# Altium PCB buck&boost.PcbDoc
Units mil, origin at the board's own origin, x right, y up, seen from the top; angles counter-clockwise.
Board outline 1057.5 x 651.26 mil, 2 copper layers (Top Layer, Bottom Layer); 9 components, 6 nets, 36 pads, 2 vias.
Unrouted connection lines stored in the file: 1.
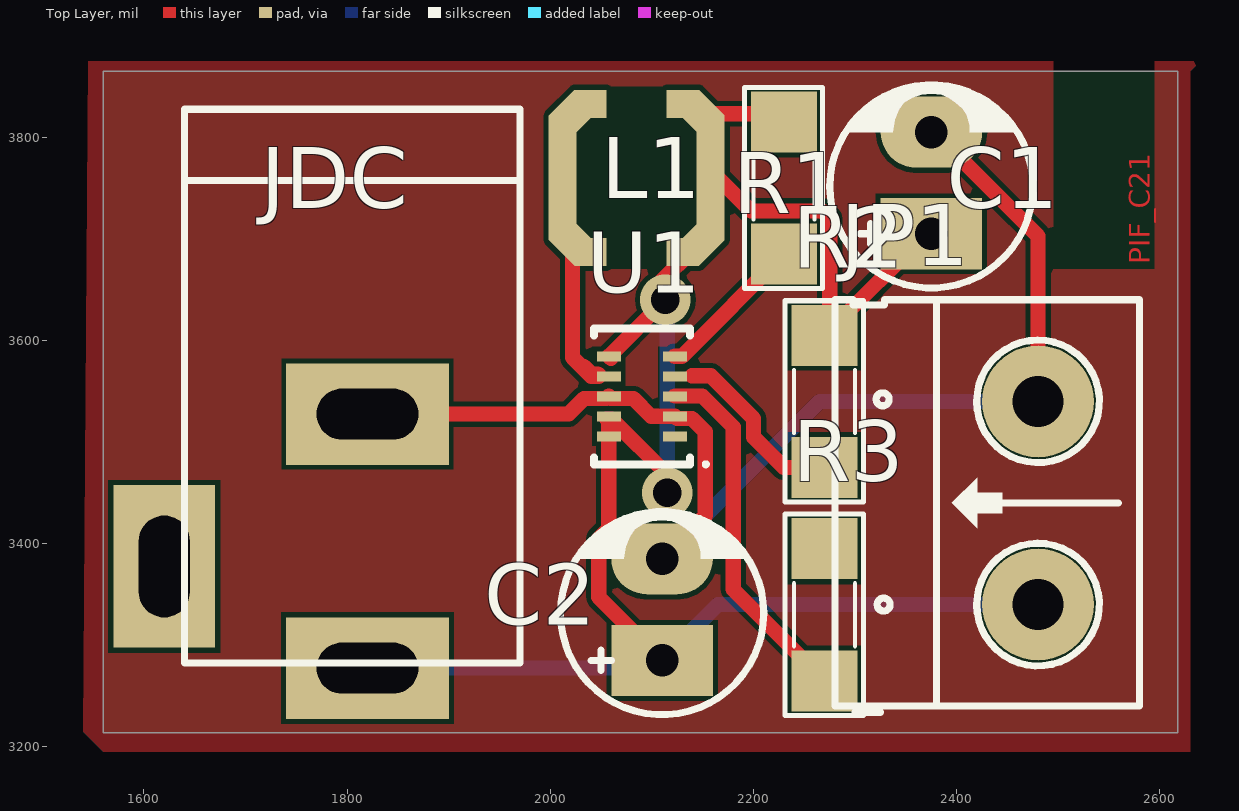
[diagram p0: Top Layer view]
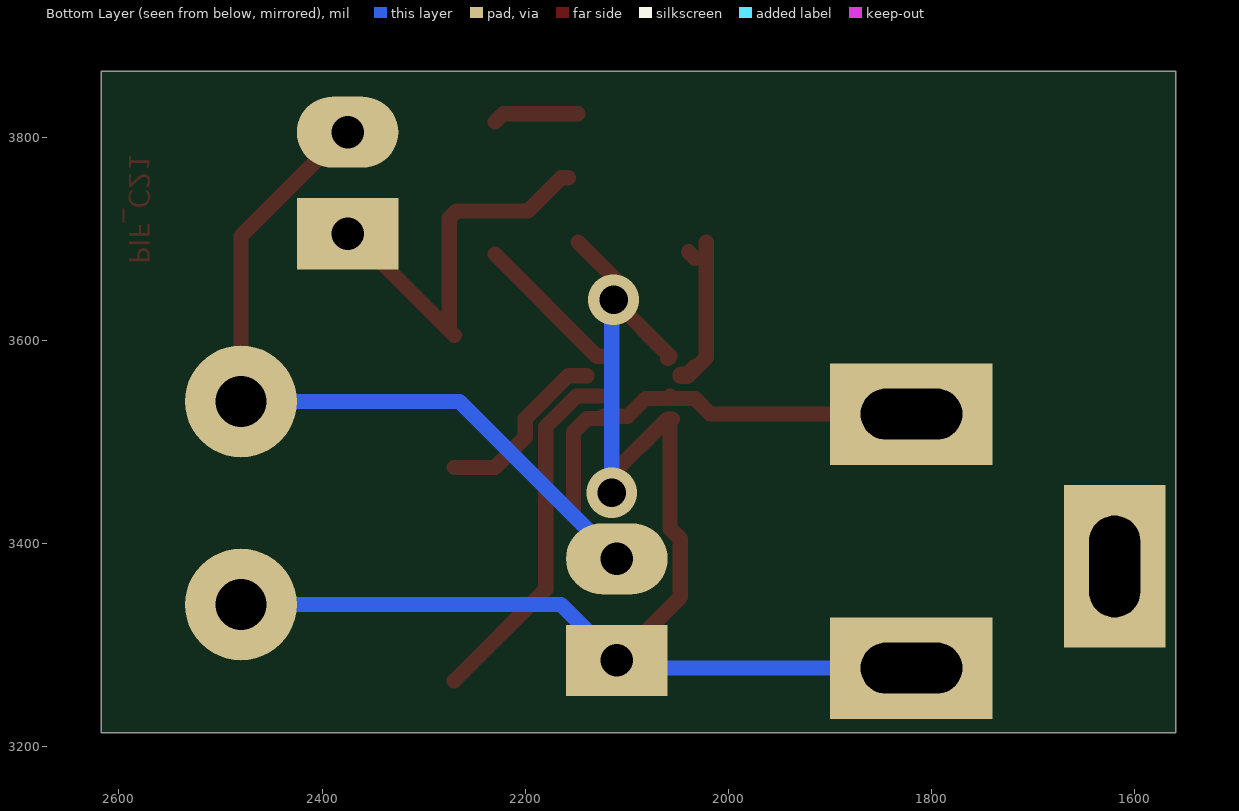
[diagram p1: Bottom Layer view, seen from below]
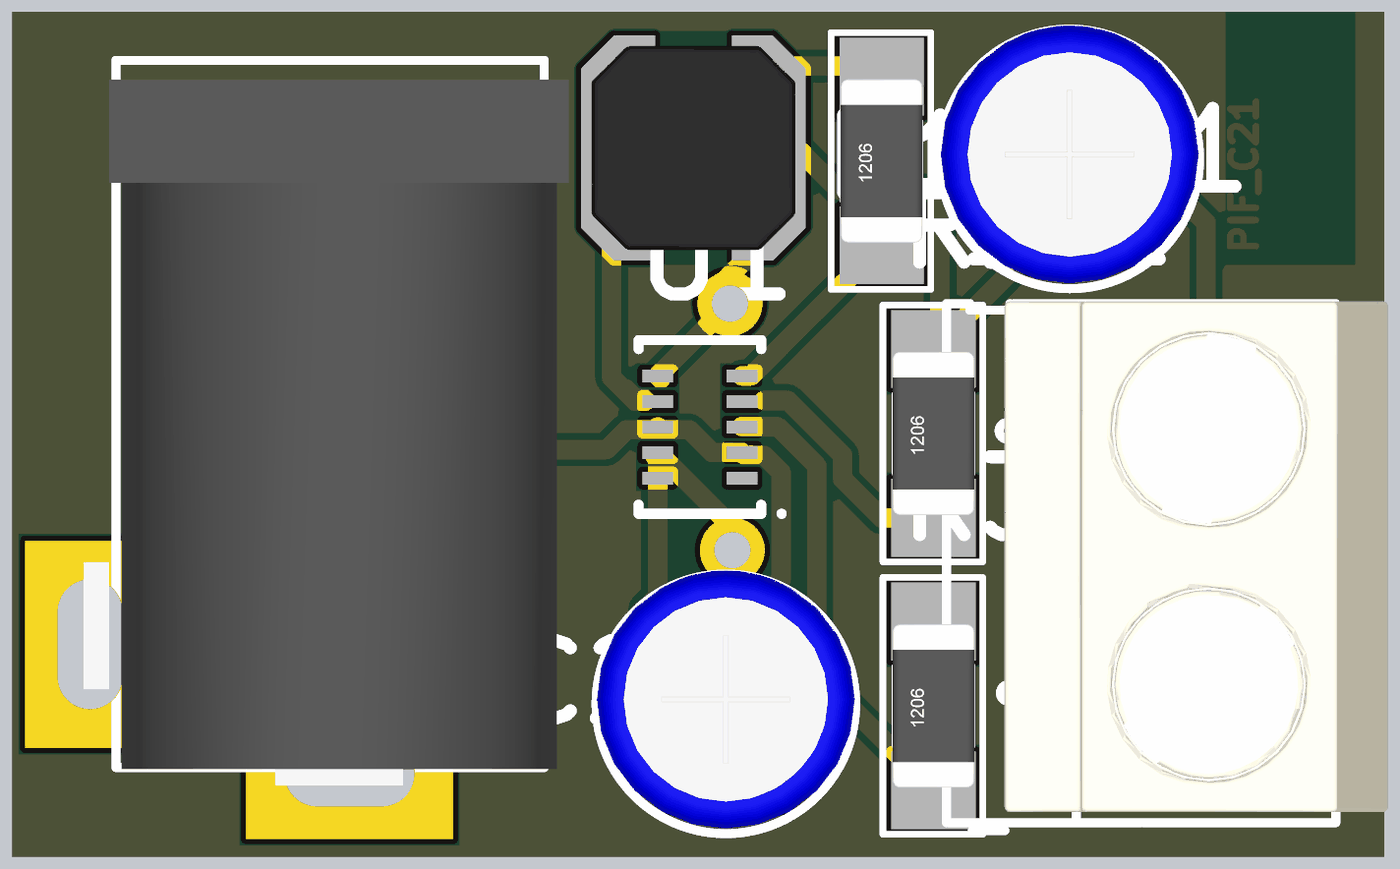
[diagram p2: 3D render of the assembled board from above, using the file's embedded part models]

## Layer stack, top to bottom
Top Solder: solder mask 0.4, Solder Resist, Dk 3.5
Top Layer: signal copper 1.4
Dielectric 1: dielectric 12.6, FR-4, Dk 4.8
Bottom Layer: signal copper 1.4
Bottom Solder: solder mask 0.4, Solder Resist, Dk 3.5

## Board outline
1560,3865 2617.5,3865 2617.5,3213.74 1560,3213.74

## Design rules (kind name [scope] priority, off if disabled: settings)
Clearance [All] p1: gap=5 ignorepadtopadclearanceinfootprint=FALSE
PolygonConnect [All] p1: connectstyle=Relief reliefconductorwidth=10 reliefentries=4 polygonreliefangle="90 Angle" airgapwidth=10
RoutingVias [All] p1: holewidth=28 width=50 viastyle="Through Hole" minholewidth=28 minwidth=50 maxholewidth=28 maxwidth=50
SolderMaskExpansion [All] p1: expansion=4
Width [All] p1: maxlimit=80 minlimit=15 preferedwidth=40
30 further rules are at their usual default settings.

## Components (designator, comment, footprint, x,y, rotation, side; value= is the part's Value field where it differs from the comment)
C1 "22uF" CP1/2 2375,3705 r90 top value=10uF/50V
C2 "10uF" CP1/2 2110,3285 r90 top value=10uF/50V
JDC "Jac DC" DC-IN 1720,3402.52 r270 top
JP1 "Header 2_1" HED2 2480,3340 r90 top value="Header 2"
L1 "0.47µH" IND_COILCRAFT_LPS4018 2085,3760 r0 top value=120µ
R1 "1k" SM-RES-1206 2230,3685 r90 top value="R1/4W - 1K"
R2 "1k" SM-RES-1206 2270,3475 r90 top value="R1/4W - 1K"
R3 "1k" SM-RES-1206 2270,3265 r90 top value="R1/4W - 1K"
U1 "TPS63802" TPS63802 2090,3545 r180 top

## Footprints (in the part's own frame and the unit in brackets; to place one, negate y for a bottom-side part, rotate by r counter-clockwise, add the part's x,y. Pads: shape width x height; smd on the part's side, far side on the other; paste and mask are expansions set on the pad)
CP1/2 [mil] "Tu hoa < 22uF/16>50V"
  rect 70x100 hole 32: 1(0,0)
  oval 70x100 hole 32: 2(100,0)
  silkscreen extent -53,-100 146,100, body extent -49,-99 149,99, height 287
DC-IN [mil] "Jac DC input"
  rect 100x160 hole 50 slot 100 at 90 deg: 1(125,100) 2(-125,100)
  rect 160x100 hole 50 slot 100 at 0 deg: 3(25,-100)
  silkscreen extent -425,-80 120,250, body extent -410,-105 134,269, height 434
HED2 [mil] "Header 2, 2 pin, hight 300mil, Pin to Pin 200, Colour Green"
  round 110 hole 50: 1(0,0) 2(200,0)
  silkscreen extent -106,-100 300,200, body extent -92,-140 302,155, height 394
IND_COILCRAFT_LPS4018 [mm] "Shielded Power Inductor, Body 4.0x4.0x1.8mm"
  round 0.5 on Mech15: 0(0,0)
  rrect1% 0.7x3.124 smd: 1(-1.85,0) 2(1.85,0)
  rrect1% 0.786x0.902 smd rot 45: 1(-1.603,-1.603) 2(1.603,1.603)
  rrect1% 0.786x0.902 smd rot 135: 1(-1.603,1.603) 2(1.603,-1.603)
  rrect1% 0.812x0.7 smd: 1(-1.156,-1.85) 1(-1.156,1.85) 2(1.156,-1.85) 2(1.156,1.85)
  Top Layer pour cut-out: -1.524,2.286 1.524,2.286 1.524,-2.286 -1.524,-2.286
  body extent -2,-2 2,2, height 1.79
SM-RES-1206 [mil]
  rect 60x65 smd: 1(0,0) 2(130,0)
  silkscreen extent -34,-38 164,39, body extent 2,-31 128,32, height 40
TPS63802 [mm] "SON, 10-Leads, Body 3,00x2,00mm, Pitch 0,50mm, IPC Medium Density"
  rect 0.6x0.25 smd: 1(-0.825,1) 2(-0.825,0.5) 3(-0.825,0) 4(-0.825,-0.5) 5(-0.825,-1) 6(0.825,-1) 7(0.825,-0.5) 8(0.825,0) 9(0.825,0.5) 10(0.825,1)
  silkscreen extent -1.65,-1.7 1.2,1.75, body extent -1.05,-1.55 1.05,1.55, height 1

## Part data
C1 C2: library part CP1, "Cap P  0,1uF < 22uF , 16 - 50V", Description 1="10 => 220uF/6,3V/10V - 10uF => 100uF/16V", Description 2="0,1uF => 33uF/50V - 10uF => 22uF/63V", Description 3="0,47uF => 10uF/100V"
JDC: library part DCIN, "Jac DC input"
JP1: "Header, 2-Pin", Manufacturer="Generic Components", Class=Connector
L1: library part INDC_120u_LPS4018, "Inductor shielded 120uH 300mA LPS4018 SMD", Current=300mA, DC Resistance (DCR)="1.6 Ohm Max", Frequency - Self Resonant=9MHz, Frequency - Test=100kHz, Manufacturer 1=Coilcraft, Manufacturer Part Number 1=LPS4018-124ML, Package / Case=LPS4018, Ratings="300 mArms", Supplier Part Number 1=LPS4018-124MLC, Tolerance=±20%, Material - Core=Ferrite, SCDType=spec, Supplier 1=Coilcraft, Type="Ferrite Core"
R1 R2 R3: library part R, "Resistor 1/4W"
U1: "SMD"

## Via types
v1: diameter 50, hole 28, Top Layer to Bottom Layer, 2 vias

## Nets (pads, with @x,y where several pads share a name; then routed paths per layer and width w, separated by ;. In a path a pad name is that pad's centre, name@x,y a point inside that pad or via, vN(x,y) a via of type N, cw(c..) or ccw(c..) an arc to the next point about the centre after c; other vN are vias at no path point)
GND: C1.2 C2.2 JDC.2 JP1.2 U1.2 U1.8 | length 1241.1
  Top Layer w15: JDC.2 2017.99,3527.52 2033.21,3542.74 2055.26,3542.74 U1.8 2059.78,3542.74 2081.83,3542.74 2099.25,3525.31 U1.2 2124.74,3523.05 2139.47,3523.05 2152.5,3510.02 2152.5,3427.5 C2.2 ; C1.2 2377.68,3805 2480,3702.68 JP1.2
  Bottom Layer w15: C2.2 2265,3540 JP1.2
NetL1_1: L1.1 U1.7 | length 175
  Top Layer w15: L1.1@2021.89,3696.89 2021.89,3583.11 2040.31,3564.69 2047.5,3564.69 2047.5,3566.11 2046.66,3566.95 2040.53,3566.95 2033.21,3574.27 ; L1.1@2033.21,3680.89 L1.1@2039.49,3687.17
NetR1_1: R1.1 U1.5 | length 149.2
  Top Layer w15: U1.5 2129.37,3584.37 R1.1
NetR2_1: R2.1 R3.2 U1.4 | length 178.7
  Top Layer w15: 2139.47,3565.31 2157.79,3565.31 2200,3523.1 2200,3504.78 2229.78,3475 R2.1
NetR3_1: R3.1 U1.3 | length 357.2
  Top Layer w15: U1.3@2122.48,3545.31 2149.5,3545.31 2180,3514.82 2180,3355 R3.1
VCC: C1.1 C2.1 JDC.1 JP1.1 L1.2 R1.2 R2.2 U1.6 U1.9 U1.10 | length 1877.1
  Top Layer w15: U1.9@2055.26,3522.74 U1.9@2057.52,3522.74 ; U1.6@2059.78,3582.11 U1.6 v1(2113.15,3640) ; v1@2102.18,3650.97 L1.2@2148.11,3696.89 ; C2.1 2047.5,3347.5 2047.5,3404.68 2057.52,3414.7 U1.10 U1.9@2057.52,3522.74 ; v1@2115,3440 v1(2115,3450) 2115,3467.83 2060.1,3522.74 U1.9@2057.52,3522.74 ; L1.2@2148.11,3823.11 2221.89,3823.11 R1.2 ; L1.2@2157.83,3760 2165,3760 2197.5,3727.5 2267.68,3727.5 2275,3720.18 R2.2@2275,3610 ; R2.2 R2.2@2275,3610 ; C1.1 2370,3705 R2.2@2275,3610
  Bottom Layer w15: JDC.1 2102.52,3277.52 C2.1 2165,3340 JP1.1 ; v1(2113.15,3640) 2115,3638.15 v1(2115,3450)
pads on no net: JDC.3 L1.0 U1.1

## Polygon pours and split planes (outlines as drawn)
no net on Top Layer "Top Layer-No Net" (solid, pour order 18): 1545,3875 2640,3875 2630,3865 2630,3195 1560,3195 1540,3215

## Other copper
Top Layer:
  text "PIF_C21" at 2590,3675 h20 r90

## Silkscreen, mask and mechanical layers (free items; w line width, h text height)
Mechanical 1:
  the board outline again, w19.24